# Altium PCB SY_HR08_MCU_PCB_V1.1.PcbDoc (part 2 of 3)
Units mm, origin at the board's own origin, x right, y up, seen from the top; angles counter-clockwise.
Board outline 140 x 80 mm, 2 copper layers (Top Layer, Bottom Layer); 373 components, 215 nets, 1143 pads, 670 vias.
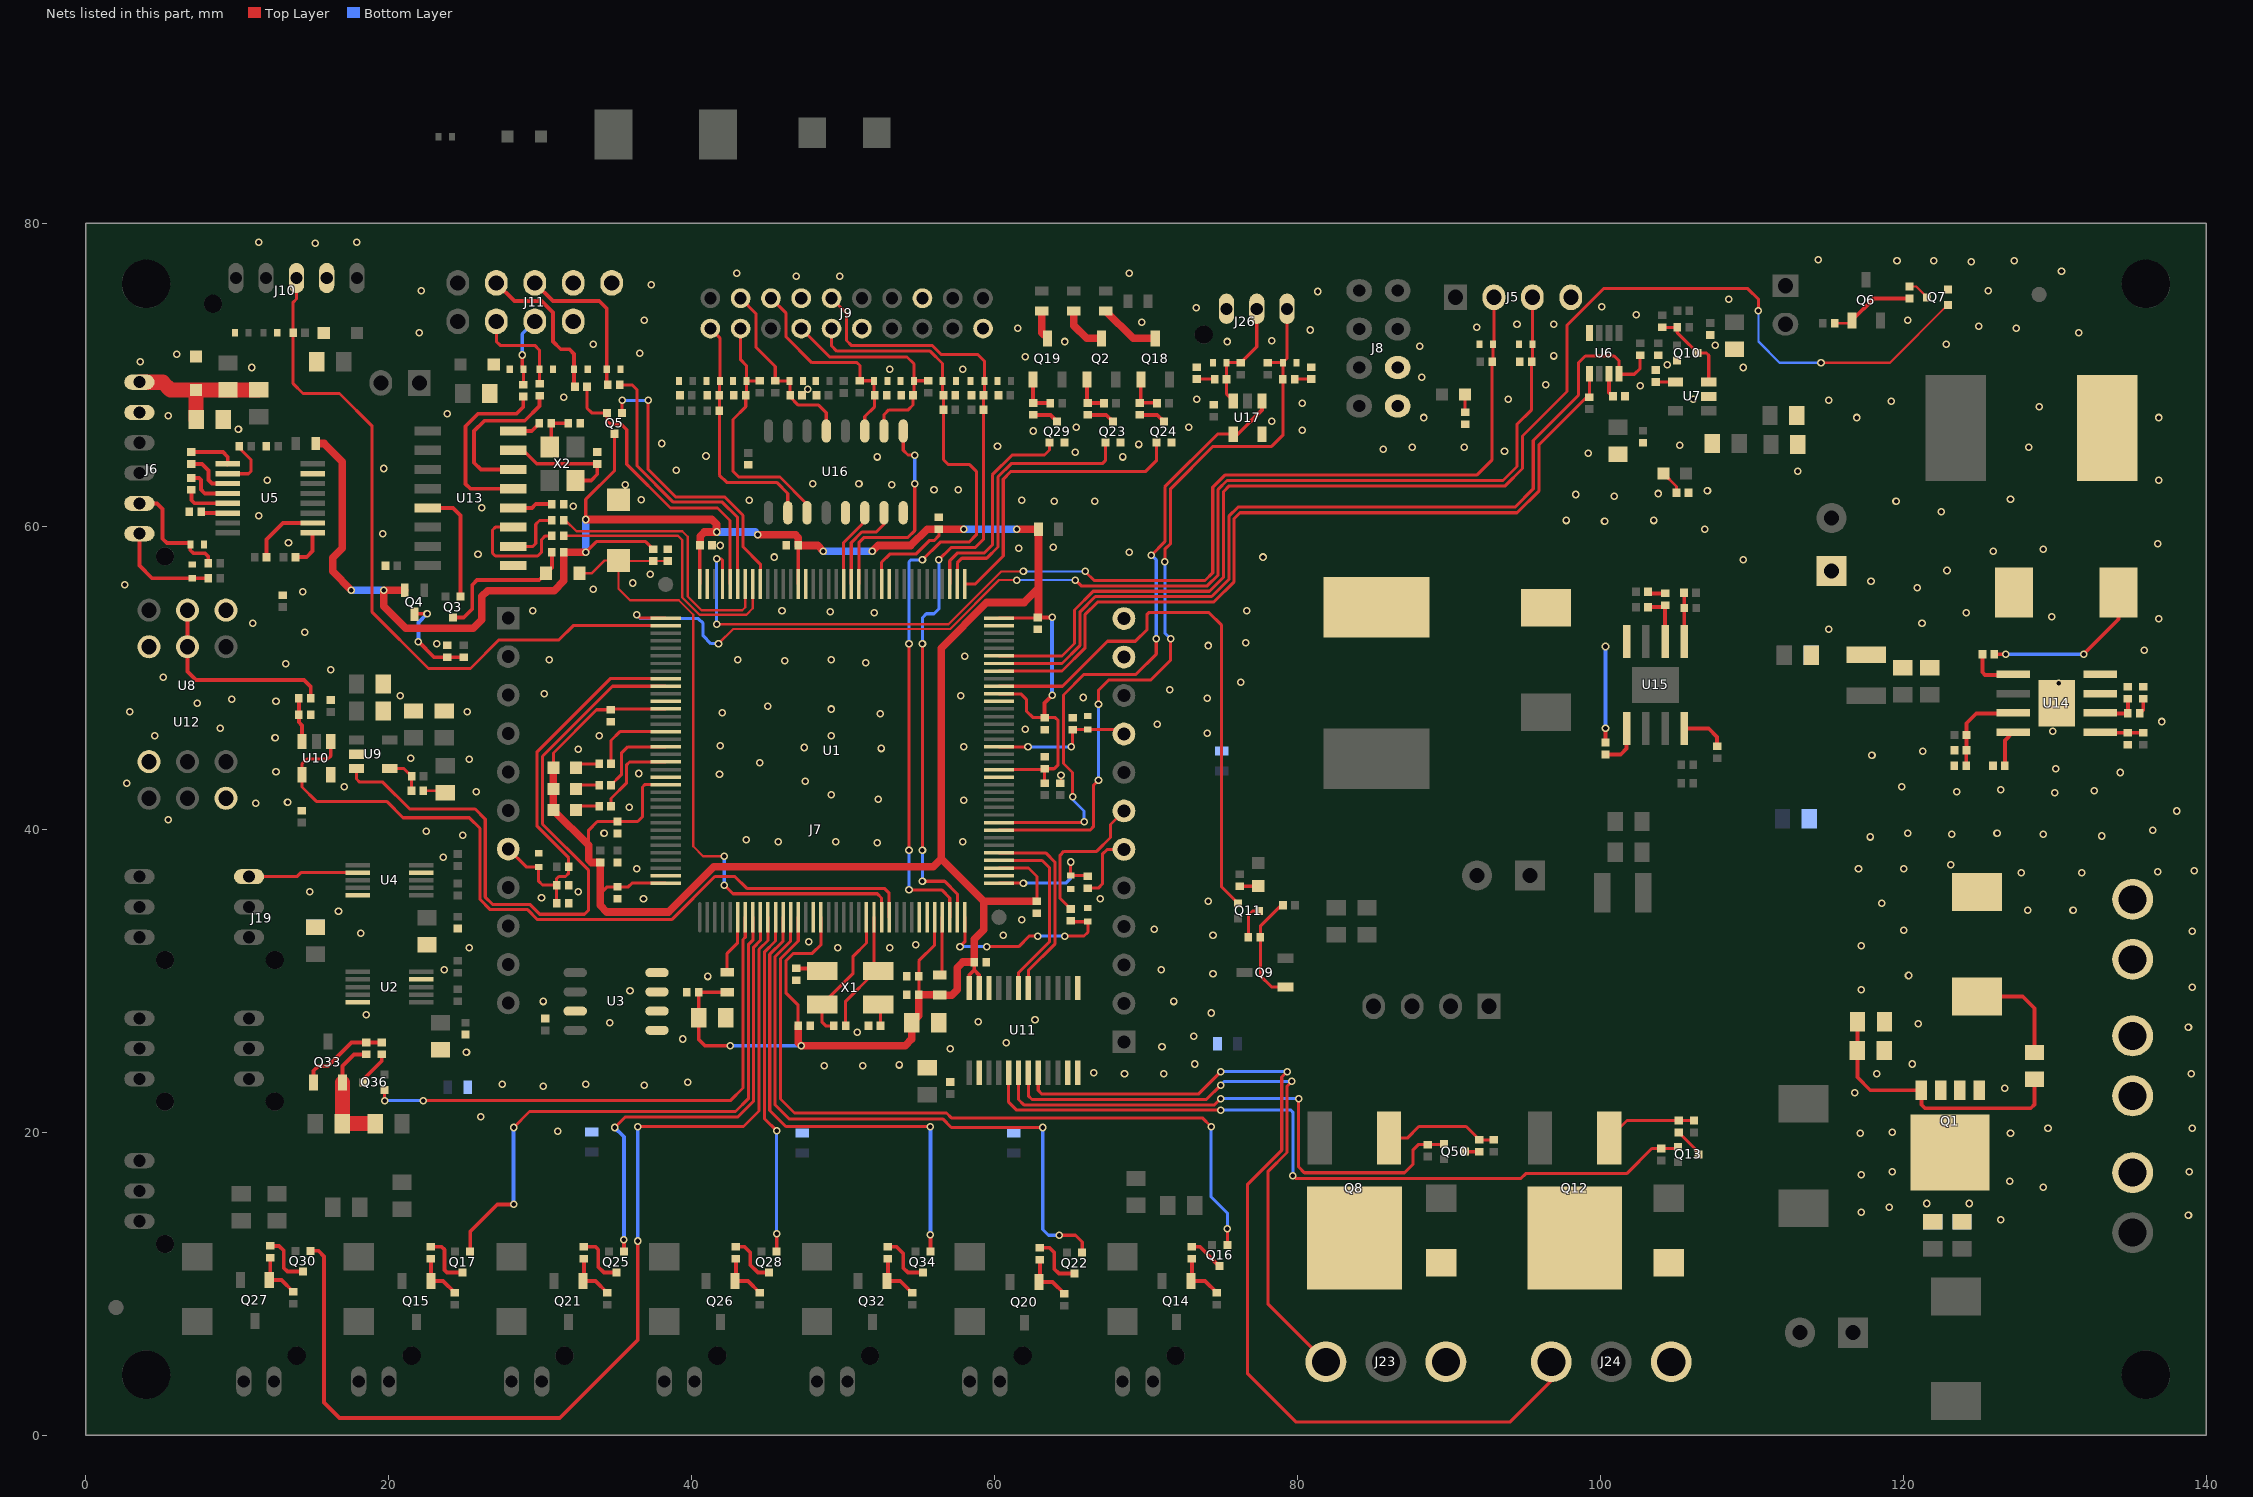
[diagram p2: the nets of this part, all layers, seen from the top]

## Via types
v1: diameter 0.5, hole 0.3, Top Layer to Bottom Layer, tented both sides, 661 vias
v2: diameter 1.016, hole 0.61, Top Layer to Bottom Layer, tented both sides, 9 vias

## Nets (pads, with @x,y where several pads share a name; then routed paths per layer and width w, separated by ;. In a path a pad name is that pad's centre, name@x,y a point inside that pad or via, vN(x,y) a via of type N, cw(c..) or ccw(c..) an arc to the next point about the centre after c; other vN are vias at no path point) (continued)
DAC_CH5: J19.1 U4.7 | length 7.3
  Top Layer w0.203: J19.1@10.795,36.877 13.954,36.877 14.216,37.139 U4.7@17.966,37.139
DGND: C3.2 C4.2 C5.2 C6.2 C7.2 C8.2 C9.2 C10.2 C11.2 C12.2 C13.2 C14.1 C15.2 C16.2 C17.2 C18.2 C19.2 C20.2 C21.1 C22.1 C23.2 C24.1 C25.2 C29.1 C30.2 C31.1 C32.1 C33.2 C34.1 C35.1 C36.1 C37.1 C38.1 C39.2 C40.1 C41.1 C42.1 C43.1 C44.1 C45.1 C46.1 C47.1 C48.1 C49.1 C50.1 C51.2 C52.1 C53.1 C54.1 C55.2 C56.1 C57.1 C58.1 C59.1 C61.2 C62.1 C63.1 C64.1 C65.1 C66.1 C67.1 C68.1 C69.1 C81.2 C83.2 C84.2 C85.1 C86.2 C87.1 C88.1 C89.2 C90.1 C91.2 D4.2 D5.2 D6.2 D10.2 D11.2 D12.2 D13.2 D14.2 D16.2 D17.2 D18.2 D19.2 D20.2 D21.2 D34.2 D35.2 D36.2 D37.2 D38.2 D39.2 D40.2 D41.2 D42.2 D43.2 D44.2 D45.2 D46.2 D47.2 D48.2 D49.2 J5.4 J6.2 J7.11 J7.12 J8.6 J8.8 J9.6 J9.13 J9.17 J10.2 J11.7 J11.8 J11.9 J26.3 KEY1.2 Q7.2 Q10.2 Q23.2 Q24.2 Q29.2 R8.2 R10.2 R17.1 R28.2 R41.1 R42.2 R44.1 R48.2 R63.1 R71.1 R72.1 R73.1 R75.1 R87.1 R88.1 R89.2 R90.2 R91.2 R92.2 R107.2 R108.2 R130.1 R136.2 R137.2 R138.2 R139.2 R140.2 U1.16 U1.30 U1.31 U1.38 U1.51 U1.61 U1.71 U1.83 U1.94 U1.107 U1.120 U1.130 U1.143 U2.4 U2.10 U3.1 U3.2 U3.3 U3.4 U3.7 U4.4 U4.10 U5.15 U6.4 U7.2 U8.3 U8.6 U9.2 U10.5 U11.2 U11.11 U11.12 U11.13 U11.22 U12.3 U12.6 U13.1 U14.7 U14.9 U16.5 U16.8 U17.5 | length 2.5
  Top Layer w0.15: R44.1@22.301,42.545 23.622,42.545 C54.1@23.749,42.418 ; R8.2@64.325,43.053 64.389,43.116 v1(64.389,43.561)
  Top Layer w0.203: C25.2@11.925,65.278 C25.2@11.938,65.265
  Top Layer w0.254: J9.17@47.245,75.057 J9.17@47.643,75.057
  other v1: 31.178,20.066 26.098,21.018 30.226,23.05 36.893,23.114 27.495,23.177 33.02,23.177 39.751,23.304 68.58,23.876 71.183,23.876 66.548,23.939 48.768,24.384 51.308,24.384 53.721,24.447 73.215,24.511 25.146,25.273 57.087,25.527 71.056,25.654 60.77,25.908 39.433,26.162 73.152,26.352 50.927,26.607 34.608,27.241 58.928,27.305 62.674,27.432 18.542,27.749 74.295,27.877 30.226,28.639 71.819,28.639 35.941,29.337 41.084,30.29 74.422,30.48 23.685,30.734 70.993,30.734 25.336,32.194 49.657,32.194 53.086,32.194 54.8,32.385 47.752,32.575 60.579,33.02 74.422,33.02 18.161,33.147 70.549,33.401 61.785,34.036 16.7,34.608 74.105,35.242 36.83,35.433 66.992,35.433 30.099,35.496 14.795,35.877 32.512,35.877 36.386,37.401 23.622,38.163 52.261,39.116 45.72,39.179 49.53,39.179 57.912,39.179 43.624,39.306 117.792,39.497 133.096,39.56 24.892,39.624 123.19,39.688 129.222,39.688 34.227,39.751 120.269,39.751 126.174,39.751 22.479,39.878 136.462,39.941 5.461,40.64 138.049,41.212 35.877,41.465 11.239,41.719 13.335,41.783 57.975,41.91 52.324,41.974 49.212,42.291 129.984,42.418 25.781,42.481 123.507,42.481 132.588,42.545 126.428,42.608 17.081,42.799 119.888,42.799 2.731,43.054 47.498,43.18 41.846,43.624 36.512,43.688 134.302,43.752 12.573,43.815 130.048,44.005 44.514,44.386 25.336,44.64 21.463,44.704 117.919,44.895 121.285,45.148 32.512,45.276 52.514,45.339 47.434,45.402 57.975,45.466 41.91,45.529 12.509,46.038 4.572,46.164 33.909,46.164 49.212,46.164 74.041,46.355 129.857,46.482 62.039,46.609 8.89,46.672 70.739,46.926 137.033,47.117 52.451,47.625 42.037,47.688 2.921,47.752 25.209,47.752 49.212,47.942 45.021,48.133 7.366,48.323 12.573,48.45 9.652,48.578 74.041,48.641 65.849,48.704 20.764,48.831 57.785,48.831 30.29,48.959 71.564,49.212 130.238,49.657 76.263,49.721 5.143,50.038 16.192,50.546 13.231,50.927 51.498,50.99 46.164,51.117 30.607,51.181 43.053,51.181 49.212,51.181 58.039,51.435 135.89,51.816 74.105,52.133 23.177,52.261 76.581,52.324 14.478,53.023 115.062,53.213 11.049,53.594 121.221,53.594 136.843,53.911 129.794,54.038 52.07,54.292 124.142,54.292 49.149,54.356 29.527,54.419 45.974,54.419 76.644,54.419 14.351,55.689 33.528,55.845 120.904,55.944 2.603,56.134 36.131,56.261 117.856,56.388 37.274,56.832 122.872,57.087 109.41,57.785 45.466,57.975 77.724,57.975 25.908,58.166 68.897,58.293 125.92,58.356 129.222,58.483 61.595,58.547 63.881,58.61 41.91,58.737 136.779,58.864 13.399,58.928 19.621,59.499 106.87,59.817 100.266,60.325 97.727,60.389 103.505,60.389 11.43,60.706 122.492,60.96 26.162,61.214 32.194,61.341 63.944,61.658 66.611,61.658 119.507,61.658 43.815,61.722 61.785,61.722 36.679,61.754 127.063,61.785 100.901,61.976 98.361,62.103 103.822,62.166 107.061,62.357 56.007,62.42 57.594,62.42 35.623,62.738 53.213,62.738 48.006,62.801 51.054,62.801 12.002,63.055 136.843,63.055 113.03,63.627 38.989,63.691 19.685,63.817 52.261,64.579 68.453,64.579 40.957,64.643 99.187,64.834 65.341,64.897 93.662,64.96 85.661,65.087 87.566,65.215 90.995,65.215 128.27,65.215 60.198,65.278 105.219,65.341 69.532,65.405 38.036,65.468 62.547,66.294 80.328,66.358 10.096,66.421 65.405,66.548 72.834,66.548 78.295,66.929 88.328,67.183 116.903,67.183 136.843,67.183 5.461,67.31 23.876,67.437 128.969,67.882 80.328,68.135 119.189,68.263 115.062,68.326 73.343,68.389 93.916,68.389 106.108,68.389 31.559,68.516 47.679,69.043 102.616,69.278 96.393,69.342 88.201,69.85 53.086,70.358 57.912,70.358 10.986,70.485 109.41,70.485 104.394,70.675 3.619,70.866 62.039,71.183 96.901,71.247 6.032,71.374 36.576,71.438 88.075,71.882 107.569,71.945 33.528,72.009 122.809,72.009 64.643,72.2 75.374,72.2 78.295,72.263 22.034,72.771 131.572,72.771 80.835,72.962 61.531,73.088 127.444,73.088 91.821,73.152 124.968,73.215 94.488,73.343 96.901,73.343 69.723,73.469 36.893,73.596 120.269,73.596 102.362,73.977 73.311,74.422 100.076,74.486 108.458,74.993 81.343,75.501 22.162,75.565 125.603,75.565 37.338,75.946 46.926,76.517 49.784,76.517 42.989,76.708 68.897,76.708 130.429,76.835 124.46,77.47 119.57,77.534 121.983,77.534 127.317,77.534 114.364,77.597 15.176,78.676 11.43,78.74 17.907,78.74
DTR: Q3.1 U13.13 | length 7.7
  Top Layer w0.254: U13.13@22.575,61.214 24.257,61.214 24.757,60.714 Q3.1@24.757,55.364
ENCODE_A: C48.2 D42.1 J9.16 R122.1 U1.35 | length 54.3
  Top Layer w0.203: J9.16@49.245,75.057 50.228,74.073 50.228,72.263 50.546,71.945 55.88,71.945 56.487,71.338 58.9,71.338 59.327,70.911 D42.1@59.327,69.596 59.327,68.7 C48.2@59.271,68.644 R122.1@59.271,67.691 59.271,59.144 58.73,58.603 57.143,58.603 v1(56.325,57.785) ; v1(55.245,36.576) 56.706,36.576 57.546,35.736 U1.35@57.546,34.198 ; v1(55.245,38.608) v1(55.245,52.261)
  Bottom Layer w0.203: v1(55.245,36.576) v1(55.245,38.608) ; v1(55.245,52.261) 55.245,53.975 55.499,54.229 56.007,54.229 56.325,54.546 v1(56.325,57.785)
ENCODE_B: C49.2 D44.1 J9.5 R128.1 U1.34 | length 53
  Top Layer w0.203: J9.5@49.245,73.057 49.245,71.913 49.593,71.564 55.753,71.564 56.573,70.744 D44.1@56.573,69.596 56.573,68.7 C49.2@56.629,68.644 R128.1@56.629,67.691 56.629,64.402 56.959,64.072 58.356,64.072 58.801,63.627 58.801,59.436 58.322,58.957 56.417,58.957 v1(55.245,57.785) ; v1(54.356,36.005) 56.515,36.005 57.046,35.474 U1.34@57.046,34.198 ; v1(54.356,38.608) v1(54.356,52.261)
  Bottom Layer w0.203: v1(54.356,36.005) v1(54.356,38.608) ; v1(54.356,52.261) 54.356,57.658 54.483,57.785 v1(55.245,57.785)
ENCODE_PB: C42.2 D40.1 J9.4 R116.1 U16.10 | length 15.4
  Top Layer w0.203: J9.4@47.245,73.057 49.118,71.183 54.229,71.183 54.691,70.722 D40.1@54.691,69.596 ; U16.10@52.705,66.296 52.705,67.373 53.023,67.691 54.307,67.691 54.625,68.008 C42.2@54.625,68.644 54.691,68.709 D40.1@54.691,69.596 ; R116.1@55.626,69.609 54.704,69.609 D40.1@54.691,69.596
FREEZE: C46.2 D43.1 J9.2 R127.1 U16.3 | length 17.2
  Top Layer w0.203: J9.2@43.245,73.057 43.245,70.992 43.636,70.601 D43.1@43.636,69.596 ; R127.1@44.514,69.609 44.501,69.596 D43.1@43.636,69.596 ; U16.3@47.625,60.896 47.625,61.468 45.839,63.254 43.109,63.254 42.735,63.627 42.735,67.056 43.58,67.9 C46.2@43.58,68.644 43.636,68.7 D43.1@43.636,69.596
GAS_ADC_OUT: U1.26 U10.1 U10.4 | length 53
  Top Layer w0.203: U10.1@16.19,45.804 16.19,44.829 16.002,44.64 14.61,44.64 14.29,44.321 U10.4@14.29,43.604 14.29,42.797 15.24,41.846 19.875,41.846 20.955,40.767 25.336,40.767 26.035,40.069 26.035,35.378 26.714,34.699 29.182,34.699 29.839,34.042 38.689,34.042 41.54,36.893 42.862,36.893 43.652,36.104 52.733,36.104 53.046,35.791 U1.26@53.046,34.198
GND_IN: C2.1 D1.1 J1.2 Q1.1 Q1.2 Q1.3 R2.1
  other v1: 116.776,22.606 126.682,22.924 118.237,23.876 139.001,23.876 120.587,24.511 138.811,26.924 120.968,27.178 117.221,29.4 139.065,29.591 120.332,30.353 117.221,32.322 139.065,33.274 120.015,33.337 128.207,34.671 131.191,34.671 118.554,35.115 127.762,37.148 131.762,37.148 136.779,37.211 139.192,37.274 117.03,37.401 120.015,37.401 123.126,37.655
IRDA: J9.10
KEY_IN_GLOVE: C92.2 D48.1 J26.2 R80.2 U17.3 | length 7.6
  Top Layer w0.203: U17.3@75.758,68.283 75.317,68.724 C92.2@75.317,69.723 D48.1@75.317,70.802 R80.2@76.263,70.802 77.311,71.85 J26.2@77.311,74.358
LDO_3V3_EN: Q10.3 R34.1 R36.2 U7.3 | length 5.8
  Top Layer w0.203: R36.2@104.076,73.139 105.054,73.139 R34.1@105.067,73.152 105.067,72.788 105.401,72.454 105.407,72.454 106.418,71.443 Q10.3@106.418,71.438 106.998,71.438 107.145,71.29 U7.3@107.145,69.53
LED1: R25.1 U1.124 | length 5.4
  Top Layer w0.203: R25.1@34.69,44.323 34.69,45.866 35.272,46.448 U1.124@38.296,46.448
LED2: R26.1 U1.126 | length 5.5
  Top Layer w0.203: R26.1@34.69,42.926 35.369,43.606 35.369,45.021 35.796,45.448 U1.126@38.296,45.448
LED3: R27.1 U1.128 | length 5.8
  Top Layer w0.203: R27.1@34.69,41.529 34.69,42.037 35.723,43.07 35.723,44.265 35.905,44.448 U1.128@38.296,44.448
LTC_INT: R24.1 U1.65 U6.5 | length 53.5
  Top Layer w0.203: U1.65@60.296,50.448 64.453,50.448 65.984,51.979 65.984,54.19 66.805,55.011 74.48,55.011 75.819,56.35 75.819,60.515 76.2,60.896 94.488,60.896 95.948,62.357 95.948,65.405 99.073,68.529 R24.1@99.269,68.529 U6.5@99.269,70.071
MAIN: C47.2 D45.1 J9.18 R129.1 U16.11 | length 14.2
  Top Layer w0.203: J9.18@45.245,75.057 46.244,74.057 46.244,72.501 47.942,70.802 50.927,70.802 51.117,70.612 R129.1@51.117,69.609 52.031,69.609 D45.1@52.044,69.596 52.044,68.691 C47.2@52.092,68.644 52.092,67.903 51.435,67.246 U16.11@51.435,66.296
MCU_3V3: C3.1 C4.1 C5.1 C7.1 C9.1 C10.1 C12.1 C13.1 C14.2 C15.1 C16.1 C17.1 C18.1 C19.1 C45.2 C52.2 C83.1 D7.2 D8.2 D9.2 Q4.2 Q5.3 R7.1 R9.1 R12.1 R13.1 R29.2 R56.1 R77.1 R135.1 U1.17 U1.32 U1.39 U1.52 U1.62 U1.72 U1.84 U1.95 U1.108 U1.121 U1.131 U1.144 U11.23 U11.24 | length 265
  Top Layer w0.203: D7.2@30.885,44.069 30.885,45.045 33.731,47.892 C5.1@34.677,47.892 34.733,47.948 U1.121@38.296,47.948 ; v1(33.02,58.293) 33.718,58.991 36.97,58.991 R12.1@37.465,58.496 ; v1(33.02,60.452) 33.02,61.785 34.925,63.691 Q5.3@34.925,66.112 ; 33.21,38.949 33.21,39.941 33.782,40.513 C4.1@35.115,40.513 36.449,40.513 36.767,40.831 36.767,42.799 36.915,42.948 U1.131@38.296,42.948 ; 33.972,35.75 34.43,36.208 C3.1@35.115,36.208 35.827,36.208 36.067,36.448 U1.144@38.296,36.448 ; C7.1@40.526,58.801 40.546,58.781 U1.108@40.546,56.197 ; C10.1@47.041,27.03 47.041,28.397 46.228,29.21 46.228,31.305 46.736,31.813 47.975,31.813 48.546,32.385 U1.17@48.546,34.198 ; U1.95@47.046,56.197 C9.1@47.046,58.737 ; U1.84@52.546,56.197 52.546,57.626 53.086,58.166 54.8,58.166 55.689,59.055 56.007,59.055 56.325,59.372 C12.1@56.325,59.817 ; C15.1@54.991,29.083 55.004,29.096 C13.1@55.004,30.29 55.004,31.318 56.046,32.36 U1.32@56.046,34.198 ; U1.39@60.296,37.448 62.247,37.448 62.801,36.893 C16.1@62.801,35.255 ; U1.52@60.296,43.948 63.256,43.948 C17.1@63.309,44.001 ; U1.62@60.296,48.948 61.733,48.948 62.103,48.578 62.103,47.816 62.547,47.371 C18.1@63.309,47.371 64.008,47.371 64.198,47.18 64.198,44.259 63.94,44.001 C17.1@63.309,44.001 ; U1.72@60.296,53.947 62.825,53.947 C19.1@62.865,53.988 ; R7.1@63.309,43.053 C17.1@63.309,44.001
  Top Layer w0.254: R77.1@42.355,29.248 C83.1@40.475,29.248 C45.2@40.475,27.559 40.475,26.136 40.894,25.717 v1(42.545,25.717) ; U11.24@58.338,29.533 58.338,30.398 58.661,30.721 ; C52.2@58.661,31.242 58.661,30.721 ; U11.23@58.988,29.533 58.988,30.395 58.661,30.721 ; C19.1@62.865,53.988 v1(63.805,53.988) ; C18.1@63.309,47.371 63.309,48.349 v1(63.805,48.844)
  Top Layer w0.5: R135.1@15.202,65.468 15.748,65.468 16.954,64.262 16.954,58.547 16.319,57.912 16.319,57.023 v1(17.551,55.791) ; Q4.2@21.067,55.791 v1(19.685,55.791) 19.685,54.737 21.145,53.276 25.59,53.276 26.162,53.848 26.162,55.372 26.543,55.753 30.924,55.753 31.572,56.401 R56.1@31.572,58.293 v1(33.02,58.293) ; D7.2@30.885,44.069 D8.2@30.885,42.672 D9.2@30.885,41.275 33.21,38.949 33.21,38.004 33.401,37.813 R9.1@33.972,37.813 33.972,35.75 33.972,34.989 34.417,34.544 38.481,34.544 41.465,37.529 55.96,37.529 56.492,38.06 ; C7.1@40.564,58.737 40.564,59.36 40.831,59.627 v1(41.656,59.627) ; v1(44.386,59.436) 46.863,59.436 47.046,59.253 C9.1@47.046,58.737 48.323,58.737 v1(48.704,58.356) ; C10.1@47.041,27.03 47.041,25.921 v1(47.244,25.717) 54.102,25.717 54.546,26.162 C14.2@54.546,27.241 54.991,27.686 C15.1@54.991,29.083 56.363,29.083 R13.1@56.388,29.058 57.188,29.058 57.531,29.4 57.531,30.861 57.912,31.242 C52.2@58.661,31.242 58.661,32.753 59.296,33.388 59.296,35.255 ; v1(51.943,58.356) 52.324,58.737 54.483,58.737 55.562,59.817 C12.1@56.325,59.817 v1(57.975,59.817) ; v1(61.468,59.817) R29.2@62.903,59.817 62.903,55.918 ; C16.1@62.801,35.255 59.296,35.255 ; C19.1@62.865,53.988 62.903,54.026 62.903,55.918 ; 56.492,38.06 59.296,35.255 ; 56.492,38.06 56.492,51.966 59.5,54.974 61.959,54.974 62.903,55.918
  Top Layer w0.508: v1(33.02,60.452) 41.338,60.452 41.656,60.134 v1(41.656,59.627)
  Bottom Layer w0.254: v1(42.545,25.717) v1(47.244,25.717) ; v1(63.805,48.844) v1(63.805,53.988)
  Bottom Layer w0.5: v1(17.551,55.791) v1(19.685,55.791) ; v1(41.656,59.627) 44.196,59.627 v1(44.386,59.436) ; v1(48.704,58.356) v1(51.943,58.356) ; v1(57.975,59.817) v1(61.468,59.817)
  Bottom Layer w0.508: v1(33.02,58.293) v1(33.02,60.452)
MCU_KILL: R131.1 U1.66 U6.8 | length 59.6
  Top Layer w0.203: U1.66@60.296,50.948 64.453,50.948 65.631,52.126 65.631,54.337 66.659,55.364 74.334,55.364 75.466,56.496 75.466,60.662 76.073,61.269 94.352,61.269 95.56,62.477 95.56,65.666 98.552,68.658 98.552,70.802 98.996,71.247 100.901,71.247 101.219,70.929 U6.8@101.219,70.071 101.25,70.04 102.235,70.04 102.616,70.421 R131.1@102.616,71.298
NetC2_2: C2.2 Q1.4 R1.1 R2.2 | length 18.5
  Top Layer w0.254: R2.2@116.967,27.305 116.967,25.413 C2.2@116.954,25.4 116.954,23.635 117.809,22.78 Q1.4@121.178,22.78 121.178,21.824 121.412,21.59 128.397,21.59 128.651,21.844 R1.1@128.651,23.495
NetC6_1: C6.1 X1.2 | length 1.8
  Top Layer w0.254: C6.1@46.926,30.823 48.449,30.823 X1.2@48.624,30.648
NetC8_1: C8.1 X1.4 | length 1.5
  Top Layer w0.203: X1.4@52.324,28.448 52.477,28.295 C8.1@52.477,27.03
NetC26_1: C26.1 U5.3 | length 3.3
  Top Layer w0.254: C26.1@6.985,64.122 7.696,64.122 8.128,63.691 8.128,63.055 8.36,62.824 U5.3@9.392,62.824
NetC26_2: C26.2 U5.1 | length 3.1
  Top Layer w0.254: C26.2@6.985,64.91 9.068,64.91 9.392,64.585 U5.1@9.392,64.124 U5.1@9.352,64.084
NetC27_2: C27.2 U5.2 | length 3.6
  Top Layer w0.203: U5.2@9.392,63.474 10.757,63.474 10.922,63.639 10.922,64.402 10.147,65.177 C27.2@10.147,65.278
NetC28_1: C28.1 U5.5 | length 3.2
  Top Layer w0.254: C28.1@6.985,62.408 6.985,61.722 7.183,61.524 U5.5@9.392,61.524
NetC28_2: C28.2 U5.4 | length 3.2
  Top Layer w0.254: C28.2@6.985,63.195 7.48,63.195 7.62,63.055 7.62,62.42 7.866,62.174 U5.4@9.392,62.174
NetC29_2: C29.2 U5.6 | length 1.8
  Top Layer w0.254: C29.2@7.633,60.96 7.719,60.874 U5.6@9.392,60.874
NetC31_2: C31.2 D6.1 J6.1 R18.1 R19.1 | length 10
  Top Layer w1: J6.1@3.556,69.516 5.096,69.516 5.608,69.004 D6.1@7.302,69.004 ; C31.2@7.302,67.056 D6.1@7.302,69.004 ; R18.1@11.387,69.004 R19.1@9.398,69.004 D6.1@7.302,69.004
NetC33_1: C33.1 U6.7 | length 1.6
  Top Layer w0.254: U6.7@100.569,70.071 100.569,68.836 C33.1@100.825,68.58
NetC56_2: C56.2 U13.4 | length 2.7
  Top Layer w0.254: U13.4@28.225,61.214 29.464,61.214 29.718,61.468 C56.2@30.785,61.468
NetC57_2: C57.2 U13.7 X2.1 | length 8.6
  Top Layer w0.254: U13.7@28.225,65.024 28.892,65.024 29.781,64.135 C57.2@33.782,64.135 ; X2.1@32.633,63.322 X2.1@32.346,63.035 33.38,63.035 33.782,63.436 C57.2@33.782,64.122
NetC58_2: C58.2 R62.1 X2.3 | length 2.7
  Top Layer w0.254: X2.3@30.646,65.235 30.747,65.336 R62.1@30.747,66.802 C58.2@31.864,66.802
NetC60_1: C60.1 D21.1 L1.1 U14.8 | length 10.9
  Top Layer w0.254: C60.1@125.997,51.562 v1(126.746,51.562) ; v1(131.889,51.562) 134.197,53.869 D21.1@134.197,55.626
  Bottom Layer w0.254: v1(126.746,51.562) v1(131.889,51.562)
NetC60_2: C60.2 U14.1 | length 2.7
  Top Layer w0.254: C60.2@125.209,51.562 125.209,50.368 125.387,50.19 U14.1@126.69,50.19
NetC65_2: C65.2 R68.2 U14.6 | length 3.3
  Top Layer w0.254: U14.6@132.44,47.65 R68.2@134.81,47.65 C65.2@134.81,48.628
NetC68_2: C68.2 R68.1 | length 1.1
  Top Layer w0.254: R68.1@135.598,47.65 135.826,47.879 C68.2@135.826,48.628
NetC69_2: C69.2 R69.1 R75.2 U14.3 | length 6.2
  Top Layer w0.254: C69.2@124.142,44.196 124.142,45.199 R75.2@124.155,45.212 R69.1@124.155,46.228 124.155,47.003 124.803,47.65 U14.3@127.236,47.65
NetC70_1: C70.1 D23.1 L2.1 U15.8 | length 6.3
  Top Layer w0.254: C70.1@100.33,45.733 v1(100.33,46.672)
  Bottom Layer w0.254: v1(100.33,46.672) v1(100.33,52.07)
NetC70_2: C70.2 U15.1 | length 2.9
  Top Layer w0.254: C70.2@100.33,44.945 101.333,44.945 101.727,45.339 U15.1@101.727,46.655
NetC75_2: C75.2 R78.2 U15.6 | length 3.4
  Top Layer w0.254: C75.2@103.137,54.673 R78.2@104.153,54.673 ; U15.6@104.267,52.405 R78.2@104.267,54.788
NetC78_2: C78.2 R78.1 | length 1
  Top Layer w0.254: C78.2@103.251,55.575 R78.1@104.267,55.575
NetC80_1: C80.1 Q50.1 U11.6 | length 36.2
  Top Layer w0.203: U11.6@61.588,23.934 61.588,22.169 61.94,21.816 74.521,21.816 v1(74.93,22.225) ; v1(80.073,22.225) 80.073,17.716 80.454,17.335 87.058,17.335 87.63,17.907 87.63,18.86 87.96,19.19 C80.1@88.591,19.19 89.636,19.19 Q50.1@89.679,19.232
  Bottom Layer w0.203: v1(74.93,22.225) v1(80.073,22.225)
NetC82_1: C82.1 Q13.1 U11.5 | length 51.5
  Top Layer w0.203: U11.5@60.938,23.934 60.938,21.993 61.468,21.463 v1(74.93,21.463) ; v1(79.692,17.145) 79.883,16.954 94.742,16.954 95.059,17.272 101.727,17.272 103.391,18.936 C82.1@104.013,18.936 104.995,18.936 Q13.1@105.101,19.042
  Bottom Layer w0.203: v1(74.93,21.463) 79.566,21.463 79.692,21.336 v1(79.692,17.145)
NetC86_1: C86.1 D11.1 J7.19 R40.2 R42.1 U1.117 | length 26.7
  Top Layer w0.203: J7.19@27.905,38.7 29.081,37.523 D11.1@29.909,37.523 29.909,36.576 30.162,36.322 R42.1@31.102,36.322 ; C86.1@31.102,35.115 R42.1@31.102,36.322 ; U1.117@38.296,49.948 34.636,49.948 29.809,45.121 29.809,40.195 31.89,38.115 R40.2@31.89,37.529 31.89,37.097 31.686,36.893 31.242,36.893 31.102,36.754 R42.1@31.102,36.322
NetC90_2: C90.2 U7.4 | length 1.3
  Top Layer w0.203: C90.2@103.632,69.53 U7.4@104.945,69.53
NetC92_1: C92.1 R87.2 | length 1.2
  Top Layer w0.203: R87.2@73.349,69.723 C92.1@74.529,69.723
NetC93_1: C93.1 R88.2 | length 1.1
  Top Layer w0.203: C93.1@79.819,69.723 R88.2@80.905,69.723
NetC93_2: C93.2 D49.1 J26.1 R82.2 U1.44 | length 51
  Top Layer w0.203: U1.44@60.296,39.948 66.3,39.948 66.548,40.195 66.548,42.926 v1(66.865,43.243) ; v1(66.865,48.26) 66.865,49.184 67.529,49.847 70.294,49.847 71.628,51.181 v1(71.628,52.578) ; v1(71.247,57.658) 71.247,58.492 71.628,58.873 71.628,62.484 74.422,65.278 78.295,65.278 79.032,66.014 C93.2@79.032,69.723 D49.1@79.032,70.802 ; R82.2@78.041,70.802 D49.1@79.032,70.802 ; J26.1@79.311,74.358 79.311,71.082 D49.1@79.032,70.802
  Bottom Layer w0.203: v1(66.865,43.243) v1(66.865,48.26) ; v1(71.247,57.658) 71.247,52.959 v1(71.628,52.578)
NetD1_2: D1.2 J1.1 J3.2 R1.2 | length 7.1
  Top Layer w0.254: D1.2@124.841,28.973 127.872,28.973 128.651,28.194 R1.2@128.651,25.273
NetD4_1: D4.1 J6.6 R20.1 | length 7
  Top Layer w0.254: J6.6@3.556,59.516 3.556,57.404 4.387,56.573 D4.1@7.048,56.573 8.092,56.573 R20.1@8.102,56.563
NetD5_1: D5.1 J6.5 R21.1 | length 7.9
  Top Layer w0.254: J6.5@3.556,61.516 4.714,61.516 5.08,61.151 5.08,59.182 5.369,58.893 6.916,58.893 D5.1@6.916,58.801 6.916,58.425 7.112,58.229 7.874,58.229 8.102,58.001 R21.1@8.102,57.579
NetD7_1: D7.1 R25.2 | length 1.6
  Top Layer w0.203: D7.1@32.385,44.069 32.639,44.323 R25.2@33.902,44.323
NetD8_1: D8.1 R26.2 | length 1.7
  Top Layer w0.203: D8.1@32.435,42.672 D8.1@32.385,42.672 32.639,42.926 R26.2@33.902,42.926
NetD9_1: D9.1 R27.2 | length 1.6
  Top Layer w0.203: D9.1@32.385,41.275 32.639,41.529 R27.2@33.902,41.529
NetD10_1: D10.1 J5.3 R17.2 U1.109 | length 81.4
  Top Layer w0.15: v1(41.783,52.261) 42.753,53.231 57.084,53.231 60.305,56.451 v1(61.468,56.451)
  Top Layer w0.203: v1(36.386,54.165) 36.604,53.947 U1.109@38.296,53.947 ; v1(65.341,56.451) 65.722,56.07 74.041,56.07 74.759,56.789 74.759,62.44 75.347,63.028 93.565,63.028 94.488,63.951 94.488,66.739 95.453,67.704 R17.2@95.453,70.866 95.509,70.922 D10.1@95.509,72.009 95.504,72.014 J5.3@95.504,75.12
  Bottom Layer w0.15: v1(61.468,56.451) v1(65.341,56.451)
  Bottom Layer w0.203: v1(36.386,54.165) 36.639,53.911 40.45,53.911 40.767,53.594 40.767,52.768 41.275,52.261 v1(41.783,52.261)
NetD12_1: D12.1 J7.9 R41.2 U1.55 | length 9.5
  Top Layer w0.203: U1.55@60.296,45.448 v1(62.212,45.448) ; v1(65.069,45.448) 65.151,45.529 R41.2@65.151,46.583 D12.1@66.167,46.583 68.256,46.583 J7.9@68.545,46.295
  Bottom Layer w0.203: v1(62.212,45.448) v1(65.069,45.448)
NetD13_1: D13.1 R38.2 U1.36 | length 12.8
  Top Layer w0.203: v1(57.721,32.258) 58.046,32.582 U1.36@58.046,34.198 ; v1(59.499,32.258) 61.595,32.258 62.293,32.956 v1(62.865,32.956) ; v1(64.643,32.956) 65.913,32.956 66.167,33.21 D13.1@66.167,33.904 65.08,33.904 R38.2@65.024,33.96
  Bottom Layer w0.203: v1(57.721,32.258) v1(59.499,32.258) ; v1(62.865,32.956) v1(64.643,32.956)
NetD14_1: D14.1 R39.1 U1.37 | length 8
  Top Layer w0.203: U1.37@60.296,36.448 61.911,36.448 v1(61.912,36.449) ; v1(65.024,37.846) D14.1@65.024,36.962 66.111,36.962 R39.1@66.167,36.906
  Bottom Layer w0.203: v1(61.912,36.449) 64.706,36.449 65.024,36.767 v1(65.024,37.846)
NetD15_1: D15.1 Q3.3 R56.2 | length 9.8
  Top Layer w0.254: Q3.3@24.257,53.983 24.964,53.983 25.527,54.546 25.527,56.134 25.845,56.451 29.951,56.451 D15.1@30.396,56.896 30.785,57.285 R56.2@30.785,58.293
NetD16_1: D16.1 J11.3 R61.1 | length 6.6
  Top Layer w0.203: J11.3@27.114,73.533 27.114,72.2 27.368,71.945 29.654,71.945 29.967,71.633 D16.1@29.967,70.358 29.972,70.353 R61.1@29.972,69.418
NetD17_1: D17.1 J11.5 R60.1 | length 4.6
  Top Layer w0.203: v1(28.829,71.31) 28.829,70.432 D17.1@28.903,70.358 28.903,69.366 R60.1@28.892,69.355
  Bottom Layer w0.203: v1(28.829,71.31) 28.829,72.707 J11.5@29.654,73.533
NetD19_1: D19.1 J11.6 R65.1 | length 10.5
  Top Layer w0.254: J11.6@29.654,76.073 30.861,74.867 33.909,74.867 34.406,74.369 D19.1@34.406,70.358 34.406,69.404 R65.1@34.468,69.342
NetD20_1: D20.1 J11.4 R64.1 | length 10.4
  Top Layer w0.254: J11.4@27.114,76.073 28.321,74.867 30.099,74.867 30.861,74.105 30.861,72.2 31.369,71.691 31.941,71.691 32.253,71.379 D20.1@32.253,70.358 32.253,69.271 R64.1@32.309,69.215
NetD22_1: D22.1 R71.2 | length 1.6
  Top Layer w0.203: D22.1@104.152,63.5 105.016,62.636 R71.2@105.016,62.23
NetD24_1: D24.1 R84.2 | length 1.2
  Top Layer w0.254: R84.2@76.2,36.246 D24.1@77.382,36.246
NetD32_1: D32.1 J23.3 Q8.3
NetD33_1: D33.1 J24.3 Q12.3
NetD47_1: D47.1 J5.2 R14.1 U1.105 | length 76.6
  Top Layer w0.15: v1(41.656,53.53) 56.959,53.53 60.452,57.023 v1(61.912,57.023)
  Top Layer w0.203: v1(41.656,57.848) 41.974,57.848 42.046,57.776 U1.105@42.046,56.197 ; v1(65.977,57.023) 66.576,56.424 73.895,56.424 74.406,56.935 74.406,62.586 75.201,63.381 91.829,63.381 92.85,64.402 R14.1@92.85,70.866 92.9,70.917 D47.1@92.9,72.009 92.964,72.072 J5.2@92.964,75.12
  Bottom Layer w0.15: v1(61.912,57.023) v1(65.977,57.023)
  Bottom Layer w0.203: v1(41.656,53.53) v1(41.656,57.848)
NetD50_1: D50.1 R108.1 | length 1.2
  Top Layer w0.203: D50.1@91.047,68.707 91.047,67.538 R108.1@91.059,67.526
NetJ3_1: J3.1 J4.2
NetJ7_6: J7.6 R39.2 | length 4.6
  Top Layer w0.203: R39.2@66.167,36.119 66.846,36.119 67.12,36.392 67.12,38.354 67.44,38.675 J7.6@68.544,38.675
NetJ7_7: J7.7 R38.1 | length 9.8
  Top Layer w0.203: R38.1@65.024,34.747 64.333,35.438 64.333,38.298 64.579,38.544 66.739,38.544 67.652,39.458 67.652,40.322 J7.7@68.544,41.215
NetJ10_3: J10.3 R55.1 U1.110 | length 47.8
  Top Layer w0.203: J10.3@13.922,76.391 13.922,75.009 13.703,74.79 R55.1@13.703,72.771 13.703,69.418 14.351,68.771 16.764,68.771 18.923,66.611 18.923,54.339 22.645,50.617 25.408,50.617 27.296,52.505 31.25,52.505 32.192,53.448 U1.110@38.296,53.448
NetJ23_1: J23.1 U11.7 | length 40.3
  Top Layer w0.203: U11.7@62.238,23.934 62.238,22.408 62.476,22.169 73.985,22.169 v1(74.93,23.114) ; v1(79.629,23.368) 79.311,23.05 79.311,18.669 78.041,17.399 78.041,8.684 J23.1@81.869,4.856
  Bottom Layer w0.203: v1(74.93,23.114) 75.184,23.368 v1(79.629,23.368)
NetJ24_1: J24.1 U11.8 | length 63.1
  Top Layer w0.203: U11.8@62.887,23.934 62.887,22.774 63.139,22.523 73.45,22.523 v1(74.93,24.003) ; v1(79.311,24.003) 78.958,23.65 78.958,18.824 76.708,16.573 76.708,4.064 79.883,0.889 94.043,0.889 96.751,3.596 J24.1@96.751,4.856
  Bottom Layer w0.203: v1(74.93,24.003) v1(79.311,24.003)
NetQ1_5: Q1.5 R3.1 R4.1 R5.1 R6.1
  other v1: 126.428,14.224 138.811,14.541 117.221,14.732 119.062,15.05 121.539,15.303 124.333,15.303 129.222,16.383 127,16.764 117.221,17.209 119.253,17.399 138.874,17.399 117.157,19.939 127.063,19.939 119.253,20.002 129.54,20.256 139.065,20.256
NetQ2_1: Q2.1 R94.1 R100.2 | length 2.6
  Top Layer w0.254: Q2.1@66.106,69.707 66.106,68.209 R100.2@66.167,68.148 67.157,68.148 R94.1@67.17,68.135
NetQ2_3: Q2.3 R50.1 | length 3.1
  Top Layer w0.5: R50.1@65.236,74.206 65.236,73.258 66.087,72.406 Q2.3@67.056,72.406
NetQ4_3: Q4.3 R59.2 R63.2 | length 6.5
  Top Layer w0.254: Q4.3@21.717,54.191 21.755,54.229 v1(22.543,54.229) v1@22.669,54.229 ; v1(21.971,52.387) 23,51.359 R63.2@23.876,51.359 R59.2@24.956,51.359
  Bottom Layer w0.254: v1(21.971,52.387) 21.971,53.657 v1(22.543,54.229)
NetQ5_1: Q5.1 U1.100 | length 19.6
  Top Layer w0.203: v1(35.425,68.318) Q5.1@35.425,67.492 Q5.1@35.433,67.5 ; v1(37.139,68.318) 37.139,63.753 38.945,61.948 42.176,61.948 43.399,60.725 43.399,58.645 44.546,57.498 U1.100@44.546,56.197
  Bottom Layer w0.203: v1(35.425,68.318) v1(37.139,68.318)
NetQ5_2: Q5.2 R64.2 U1.104 | length 19.8
  Top Layer w0.203: R64.2@33.096,69.215 33.096,67.805 33.409,67.492 Q5.2@34.425,67.492 34.425,66.984 34.671,66.739 35.369,66.739 35.725,66.383 35.725,64.097 38.608,61.214 41.721,61.214 42.546,60.389 U1.104@42.546,56.197
NetQ6_1: Q6.1 R70.1 R74.2 | length 5.6
  Top Layer w0.15: R70.1@115.456,73.406 116.414,73.406 Q6.1@116.588,73.58
  Top Layer w0.254: Q6.1@116.588,73.58 118.053,75.044 R74.2@120.396,75.044
NetQ7_1: Q7.1 U1.67 | length 86.3
  Top Layer w0.15: v1(114.554,70.802) 119.11,70.802 Q7.1@122.928,74.621
  Top Layer w0.203: U1.67@60.296,51.448 64.453,51.448 65.278,52.273 65.278,54.483 66.512,55.717 74.187,55.717 75.113,56.643 75.113,62.293 75.494,62.674 93.711,62.674 94.854,63.817 94.854,65.959 97.791,68.896 97.791,73.28 100.203,75.692 109.728,75.692 110.426,74.993 v1(110.426,74.231)
  Bottom Layer w0.15: v1(110.426,74.231) 110.426,72.2 111.823,70.802 v1(114.554,70.802)
NetQ7_3: Q7.3 R74.1 | length 1.4
  Top Layer w0.15: R74.1@120.396,75.832 120.836,75.832 Q7.3@121.547,75.12
NetQ8_1: Q8.1 R45.1 R46.2 | length 7.6
  Top Layer w0.203: Q8.1@86.042,19.617 87.245,19.617 88.011,20.383 91.135,20.383 R46.2@92.011,19.507 R45.1@92.964,19.507
NetQ9_1: Q9.1 R81.1 R85.2 | length 7.2
  Top Layer w0.203: R81.1@78.93,34.989 77.546,33.604 R85.2@77.546,32.893 77.546,30.34 78.293,29.593 Q9.1@79.201,29.593
NetQ11_1: Q11.1 U1.63 | length 36.4
  Top Layer w0.203: U1.63@60.296,49.448 64.489,49.448 67.456,52.415 69.298,52.415 70.076,53.194 70.076,54.201 70.18,54.305 74.156,54.305 74.993,53.467 74.993,36.195 Q11.1@76.073,35.115
NetQ11_3: Q11.3 R85.1 | length 2.3
  Top Layer w0.203: R85.1@76.759,32.893 76.759,34.341 77.034,34.616 Q11.3@77.453,34.616
NetQ12_1: Q12.1 R15.1 R16.2 | length 6.1
  Top Layer w0.203: Q12.1@100.584,19.617 101.744,20.777 R16.2@105.156,20.777 R15.1@106.172,20.777
NetQ13_3: Q13.3 R16.1 | length 2
  Top Layer w0.203: R16.1@105.156,19.99 106.481,18.665 Q13.3@106.481,18.542
NetQ14_1: Q14.1 R93.1 R97.2 | length 3.5
  Top Layer w0.254: R97.2@73.025,11.658 73.025,10.259 Q14.1@72.959,10.193 73.894,10.193 R93.1@74.676,9.411
NetQ15_1: Q15.1 R95.1 R98.2 | length 3.4
  Top Layer w0.254: R98.2@22.794,11.658 Q15.1@22.794,10.193 23.602,10.193 R95.1@24.384,9.411
NetQ16_1: Q16.1 U1.14 | length 49.9
  Top Layer w0.203: U1.14@47.046,34.198 47.046,32.632 45.872,31.457 45.872,22.2 46.799,21.273 56.832,21.273 57.15,20.955 73.724,20.955 v1(74.295,20.383) ; Q16.1@75.366,12.565 v1(75.366,13.644)
  Bottom Layer w0.203: v1(74.295,20.383) 74.295,15.748 75.366,14.677 v1(75.366,13.644)
NetQ16_3: Q16.3 R97.1 | length 2.4
  Top Layer w0.254: R97.1@73.025,12.446 73.563,12.446 74.825,11.184 Q16.3@74.867,11.184
NetQ17_1: Q17.1 U1.8 | length 38.6
  Top Layer w0.203: v1(28.258,20.32) 29.309,21.372 42.907,21.372 43.752,22.217 43.752,32.386 44.046,32.68 U1.8@44.046,34.198
  Top Layer w0.254: Q17.1@25.527,11.985 Q17.1@25.392,12.12 25.392,13.454 27.178,15.24 v1(28.258,15.24)
  Bottom Layer w0.254: v1(28.258,15.24) v1(28.258,20.32)
NetQ17_3: Q17.3 R98.1 | length 3.6
  Top Layer w0.254: R98.1@22.794,12.446 23.495,12.446 23.685,12.255 23.685,10.922 23.868,10.74 Q17.3@24.892,10.74
NetQ18_1: Q18.1 R96.1 R102.2 | length 2.7
  Top Layer w0.24: R102.2@69.596,68.148 70.65,68.148 70.713,68.212 R96.1@70.726,68.199 ; R102.2@69.596,68.212 69.662,68.278 Q18.1@69.662,69.707
NetQ18_3: Q18.3 R51.1 | length 4
  Top Layer w0.5: R51.1@67.352,74.206 69.152,72.406 Q18.3@70.612,72.406
NetQ19_1: Q19.1 R99.1 R104.2 | length 2.7
  Top Layer w0.254: Q19.1@62.547,69.704 Q19.1@62.55,69.707 62.55,68.151 R104.2@62.547,68.148 62.56,68.135 R99.1@63.678,68.135 ; R99.1@63.665,68.275 R99.1@63.678,68.263
NetQ19_3: Q19.3 R52.1 | length 2
  Top Layer w0.5: R52.1@63.119,74.206 63.119,72.787 Q19.3@63.5,72.406
NetQ20_1: Q20.1 R101.1 R105.2 | length 3.5
  Top Layer w0.254: R105.2@62.992,11.595 62.992,10.195 Q20.1@62.926,10.129 63.836,10.129 R101.1@64.618,9.347
NetQ21_1: Q21.1 R103.1 R106.2 | length 3.4
  Top Layer w0.254: R106.2@32.893,11.658 32.893,10.259 Q21.1@32.827,10.193 33.66,10.193 R103.1@34.442,9.411
NetQ22_1: Q22.1 U1.13 | length 41.6
  Top Layer w0.203: U1.13@46.546,34.198 46.546,32.631 45.518,31.603 45.518,21.808 46.435,20.892 56.578,20.892 57.15,20.32 v1(63.182,20.32) ; v1(64.262,13.208) 65.341,13.208 65.791,12.759 Q22.1@65.791,12.057
  Top Layer w0.254: Q22.1@65.791,12.057 Q22.1@65.862,11.985
  Bottom Layer w0.203: v1(63.182,20.32) 63.182,13.589 63.563,13.208 v1(64.262,13.208)
NetQ22_3: Q22.3 R105.1 | length 3.6
  Top Layer w0.254: R105.1@62.992,12.383 63.627,12.383 63.944,12.065 63.944,10.986 64.254,10.676 Q22.3@65.291,10.676
NetQ23_1: Q23.1 U1.74 | length 17.9
  Top Layer w0.203: U1.74@57.546,56.197 57.546,57.594 57.848,57.897 59.485,57.897 60.226,58.638 60.226,63.265 61.096,64.135 67.12,64.135 67.318,64.334 Q23.1@67.318,65.54
NetQ23_3: Q23.3 R100.1 | length 1.8
  Top Layer w0.254: R100.1@66.167,67.361 67.378,67.361 Q23.3@67.818,66.921
NetQ24_1: Q24.1 U1.73 | length 20.2
  Top Layer w0.203: U1.73@58.046,56.197 58.737,56.197 60.579,58.039 60.579,63.119 61.087,63.627 69.985,63.627 70.684,64.325 Q24.1@70.684,65.54
NetQ24_3: Q24.3 R102.1 | length 1.8
  Top Layer w0.254: R102.1@69.596,67.361 70.743,67.361 Q24.3@71.183,66.921
NetQ25_1: Q25.1 U1.9 | length 30.7
  Top Layer w0.203: v1(34.925,20.32) 35.623,21.018 43.053,21.018 44.106,22.071 44.106,32.223 44.546,32.663 U1.9@44.546,34.198
  Top Layer w0.254: Q25.1@35.539,12.12 v1(35.539,12.911)
  Bottom Layer w0.254: v1(34.925,20.32) 35.539,19.706 v1(35.539,12.911)
NetQ25_3: Q25.3 R106.1 | length 3.5
  Top Layer w0.254: R106.1@32.893,12.446 33.655,12.446 33.846,12.255 33.846,11.112 34.218,10.74 Q25.3@35.039,10.74
NetQ26_1: Q26.1 R109.1 R113.2 | length 3.5
  Top Layer w0.254: R113.2@42.926,11.658 42.926,10.259 Q26.1@42.86,10.193 43.719,10.193 R109.1@44.501,9.411
NetQ27_1: Q27.1 R111.1 R114.2 | length 3.4
  Top Layer w0.254: R114.2@12.192,11.722 12.192,10.322 Q27.1@12.126,10.256 12.934,10.256 R111.1@13.716,9.474
NetQ28_1: Q28.1 U1.11 | length 22.8
  Top Layer w0.203: U1.11@45.546,34.198 45.546,32.63 44.812,31.896 44.812,20.91 v1(45.623,20.099)
  Top Layer w0.254: v1(45.623,13.302) Q28.1@45.623,12.12 Q28.1@45.695,12.049
  Bottom Layer w0.203: v1(45.623,13.302) v1(45.623,20.099)
NetQ28_3: Q28.3 R113.1 | length 3.4
  Top Layer w0.254: R113.1@42.926,12.446 43.497,12.446 43.878,12.065 43.878,11.239 44.378,10.74 Q28.3@45.123,10.74
NetQ29_1: Q29.1 U1.75 | length 14.4
  Top Layer w0.203: U1.75@57.046,56.197 57.046,57.721 57.575,58.25 59.338,58.25 59.857,58.769 59.857,63.396 61.168,64.707 63.301,64.707 63.635,65.04 Q29.1@63.635,65.54
NetQ29_3: Q29.3 R104.1 | length 1.8
  Top Layer w0.254: R104.1@62.547,67.361 63.695,67.361 Q29.3@64.135,66.921
NetQ30_1: Q30.1 U1.10 | length 69.5
  Top Layer w0.203: v1(36.449,20.383) 43.434,20.383 44.459,21.408 44.459,32.076 45.046,32.664 U1.10@45.046,34.198
  Top Layer w0.254: Q30.1@14.851,12.184 15.375,12.184 15.748,11.811 15.748,2.159 16.764,1.143 31.305,1.143 36.449,6.286 v1(36.449,12.827)
  Bottom Layer w0.254: v1(36.449,12.827) v1(36.449,20.383)
NetQ30_3: Q30.3 R114.1 | length 3.5
  Top Layer w0.254: R114.1@12.192,12.509 12.763,12.509 13.081,12.192 13.081,11.049 13.327,10.803 Q30.3@14.351,10.803
NetQ32_1: Q32.1 R118.1 R125.2 | length 3.5
  Top Layer w0.254: R125.2@52.959,11.658 52.959,10.259 Q32.1@52.893,10.193 53.777,10.193 R118.1@54.559,9.411
NetQ33_1: Q33.1 R120.1 R126.2 | length 6.1
  Top Layer w0.254: Q33.1@15.052,23.288 15.052,24.069 15.367,24.384 16.002,24.384 17.552,25.934 R120.1@18.542,25.934 R126.2@19.558,25.934
NetQ33_2: Q33.2 R54.2 R67.2 R120.2 | length 7.9
  Top Layer w0.254: Q33.2@16.952,23.288 16.952,24.382 17.716,25.146 R120.2@18.542,25.146
  Top Layer w1: Q33.2@16.952,23.288 16.952,20.576 R54.2@16.954,20.574 R67.2@19.113,20.574
NetQ34_1: Q34.1 U1.12 | length 32.5
  Top Layer w0.203: U1.12@46.046,34.198 46.046,32.631 45.165,31.75 45.165,21.446 46.228,20.383 v1(55.77,20.383)
  Top Layer w0.254: v1@55.753,13.271 v1(55.77,13.254) Q34.1@55.77,12.12 Q34.1@55.812,12.078
  Bottom Layer w0.254: v1(55.77,13.254) v1(55.77,20.383)
NetQ34_3: Q34.3 R125.1 | length 3.6
  Top Layer w0.254: R125.1@52.959,12.446 53.53,12.446 53.975,12.002 53.975,11.049 54.284,10.74 Q34.3@55.27,10.74
NetQ36_1: Q36.1 U1.7 | length 36.1
  Top Layer w0.203: v1(19.74,22.09) Q36.1@19.74,22.805 ; v1(22.28,22.09) 42.565,22.09 43.399,22.924 43.399,32.731 43.546,32.878 U1.7@43.546,34.198
  Bottom Layer w0.203: v1(19.74,22.09) v1(22.28,22.09)
NetQ36_3: Q36.3 R126.1 | length 2.3
  Top Layer w0.254: Q36.3@18.36,23.304 18.36,23.508 19.558,24.706 R126.1@19.558,25.146
NetQ50_3: Q50.3 R46.1 | length 1
  Top Layer w0.203: Q50.3@91.059,18.732 91.072,18.72 R46.1@92.011,18.72
NetR13_2: R13.2 U1.33 | length 3.9
  Top Layer w0.203: R13.2@56.388,30.378 56.546,30.536 U1.33@56.546,34.198
NetR22_1: R22.1 U5.10 | length 4.7
  Top Layer w0.254: R22.1@11.951,57.96 11.951,59.131 13.043,60.224 U5.10@14.992,60.224
NetR23_1: R23.1 U5.9 | length 2.5
  Top Layer w0.254: R23.1@13.856,57.975 14.605,57.975 14.992,58.362 U5.9@14.992,59.574
NetR43_1: R43.1 R44.2 U9.4 | length 2.6
  Top Layer w0.2: U9.4@20.087,44.008 21.016,44.008 R43.1@21.526,43.497 21.526,42.558 R44.2@21.514,42.545
NetR47_1: R47.1 R48.1 U10.3 | length 2.9
  Top Layer w0.254: R47.1@14.084,48.641 R48.1@14.084,47.561 14.084,47.066 14.29,46.861 U10.3@14.29,45.804
NetR47_2: R47.2 U8.5 U12.5 | length 13.4
  Top Layer w0.254: U8.5@6.731,54.467 U12.5@6.731,52.054 6.731,50.419 7.302,49.847 14.414,49.847 14.872,49.39 R47.2@14.872,48.641
NetR57_1: R57.1 U1.102 | length 18.4
  Top Layer w0.15: R57.1@31.572,60.389 31.686,60.389 32.403,59.672 37.331,59.672 37.332,59.674 39.386,59.674 39.751,59.309 39.751,55.375 40.66,54.465 43.353,54.465 43.546,54.659 U1.102@43.546,56.197
NetR57_2: R57.2 U13.2 | length 4
  Top Layer w0.203: U13.2@28.225,58.674 29.527,58.674 29.718,58.864 29.718,60.134 29.972,60.389 R57.2@30.785,60.389
NetR58_1: R58.1 U1.101 | length 18.6
  Top Layer w0.15: R58.1@31.572,59.372 37.456,59.372 37.457,59.374 39.115,59.374 39.393,59.095 39.393,55.308 40.536,54.165 43.624,54.165 44.046,54.587 U1.101@44.046,56.197
NetR58_2: R58.2 U13.3 | length 8
  Top Layer w0.203: U13.3@28.225,59.944 27.051,59.944 26.86,59.753 26.86,58.229 27.051,58.039 29.845,58.039 30.099,58.293 30.099,59.118 30.353,59.372 R58.2@30.785,59.372
NetR60_2: R60.2 U13.5 | length 12.1
  Top Layer w0.254: U13.5@28.225,62.484 25.4,62.484 25.082,62.801 25.082,66.611 25.908,67.437 28.448,67.437 28.892,67.882 R60.2@28.892,68.567
NetR61_2: R61.2 U13.6 | length 10.5
  Top Layer w0.254: U13.6@28.225,63.754 26.098,63.754 25.654,64.198 25.654,66.294 26.33,66.97 28.997,66.97 29.972,67.945 R61.2@29.972,68.631
NetR62_2: R62.2 U13.8 | length 1.9
  Top Layer w0.254: U13.8@28.225,66.294 29.451,66.294 R62.2@29.959,66.802
NetR65_2: R65.2 U1.103 | length 18.7
  Top Layer w0.203: R65.2@35.255,69.342 36.068,69.342 36.413,68.997 36.413,63.98 38.798,61.595 42.03,61.595 43.046,60.579 U1.103@43.046,56.197
NetR66_1: R66.1 R72.2 U14.5 | length 3.4
  Top Layer w0.254: U14.5@132.44,46.38 R72.2@134.81,46.38 R66.1@135.826,46.38
NetR73_2: R73.2 U14.4 | length 2.4
  Top Layer w0.254: R73.2@126.69,44.196 126.69,45.872 U14.4@127.236,46.419
NetR76_1: R76.1 R83.2 U15.5 | length 3.2
  Top Layer w0.254: U15.5@105.524,52.418 R83.2@105.524,54.61 R76.1@105.524,55.593 ; R76.1@105.524,55.613 R76.1@105.524,55.593 ; R76.1@105.537,55.58 R76.1@105.524,55.593
NetR77_2: R77.2 U1.6 | length 3.9
  Top Layer w0.203: R77.2@42.355,30.569 42.355,31.813 43.046,32.505 U1.6@43.046,34.198
NetR86_2: R86.2 U15.4 | length 3
  Top Layer w0.254: U15.4@105.537,46.655 107.142,46.655 107.696,46.101 R86.2@107.696,45.479
NetU1_40: U1.40 U11.19 | length 12.3
  Top Layer w0.203: U1.40@60.296,37.948 63.144,37.948 63.627,37.465 63.627,32.575 61.588,30.536 U11.19@61.588,29.533
NetU1_41: U1.41 U11.18 | length 13
  Top Layer w0.203: U1.41@60.296,38.448 63.373,38.448 63.98,37.84 63.98,32.421 62.238,30.678 U11.18@62.238,29.533
NetU1_45: U1.45 U17.1 U17.4 | length 42.5
  Top Layer w0.203: U1.45@60.296,40.448 65.848,40.448 v1(65.913,40.513) ; v1(65.151,42.164) 65.151,43.752 64.552,44.351 64.552,48.867 65.913,50.228 69.342,50.228 70.675,51.562 v1(70.675,52.578) ; v1(70.358,58.102) 71.247,58.991 71.247,62.611 74.719,66.083 U17.4@75.758,66.083
  Top Layer w0.254: U17.4@75.758,66.083 76.052,66.083 77.658,67.689 U17.1@77.658,68.283
  Bottom Layer w0.203: v1(65.151,42.164) 65.151,41.974 65.913,41.212 v1(65.913,40.513) ; v1(70.358,58.102) 70.675,57.785 v1(70.675,52.578)
NetU1_118: U1.118 U9.3 | length 44.3
  Top Layer w0.203: U9.3@17.886,44.008 17.886,43.328 18.098,43.116 19.621,43.116 21.399,41.338 25.717,41.338 26.388,40.668 26.388,35.524 26.86,35.052 29.328,35.052 29.985,34.396 32.935,34.396 33.21,34.671 33.21,37.294 30.162,40.342 30.162,44.822 34.788,49.448 U1.118@38.296,49.448
NIBP: C44.2 D41.1 J9.19 R119.1 U16.13 | length 12.4
  Top Layer w0.203: J9.19@43.245,75.057 44.259,74.042 44.259,71.819 45.529,70.549 R119.1@45.529,69.609 45.542,69.596 D41.1@46.454,69.596 46.51,69.54 C44.2@46.51,68.644 46.51,68.542 47.053,67.999 48.397,67.999 48.895,67.501 U16.13@48.895,66.296
NRST: C11.1 D15.2 KEY1.1 R12.2 U1.25 | length 45.2
  Top Layer w0.15: D15.2@32.596,56.896 33.401,56.896 34.258,57.753 KEY1.1@35.179,57.753 ; C11.1@38.417,57.709 R12.2@37.465,57.709 35.224,57.709 KEY1.1@35.179,57.753 ; v1(42.164,38.227) 40.767,38.227 40.114,38.88 40.114,54.163 39.159,55.118 35.941,55.118 35.179,55.88 KEY1.1@35.179,57.753
  Top Layer w0.203: v1(42.164,36.322) 42.735,35.75 52.261,35.75 52.546,35.465 U1.25@52.546,34.198
  Bottom Layer w0.203: v1(42.164,36.322) v1(42.164,38.227)
OSC_IN: R11.2 U1.23 X1.3 | length 9
  Top Layer w0.203: R11.2@49.39,27.03 48.852,27.03 48.624,27.258 X1.3@48.624,28.448 50.673,30.497 50.673,31.623 51.546,32.496 U1.23@51.546,34.198
OSC_OUT: R11.1 U1.24 X1.1 | length 7.9
  Top Layer w0.203: R11.1@50.178,27.03 50.178,28.651 52.046,30.519 U1.24@52.046,34.198
PAUSE: C43.2 D39.1 J9.1 R115.1 U16.2 | length 16.3
  Top Layer w0.203: J9.1@41.245,73.057 41.892,72.41 D39.1@41.892,69.596 41.836,69.54 C43.2@41.836,68.644 R115.1@41.836,67.627 41.836,63.384 42.319,62.901 45.621,62.901 46.355,62.166 U16.2@46.355,60.896
PB_A0: U1.87 U16.9 | length 13.9
  Top Layer w0.203: U1.87@51.046,56.197 51.046,58.92 51.399,59.273 54.292,59.273 54.737,59.718 v1(54.737,62.801) ; U16.9@53.975,66.296 53.975,65.024 54.292,64.706 v1(54.737,64.706)
  Bottom Layer w0.203: v1(54.737,62.801) v1(54.737,64.706)
PB_A1: U1.88 U16.7 | length 6.2
  Top Layer w0.203: U1.88@50.546,56.197 50.546,58.928 51.244,59.627 52.197,59.627 52.705,60.134 U16.7@52.705,60.896
PB_A2: U1.89 U16.6 | length 5.3
  Top Layer w0.203: U1.89@50.046,56.197 50.046,58.936 51.435,60.325 U16.6@51.435,60.896